# Altium PCB Prog_Adaptor.PcbDoc
Units mm, origin at the board's own origin, x right, y up, seen from the top; angles counter-clockwise.
Board outline 29.35 x 25.7 mm, 2 copper layers (Top Layer, Bottom Layer), stack 1.591 mm thick; 6 components, 10 nets, 48 pads, 1 vias.
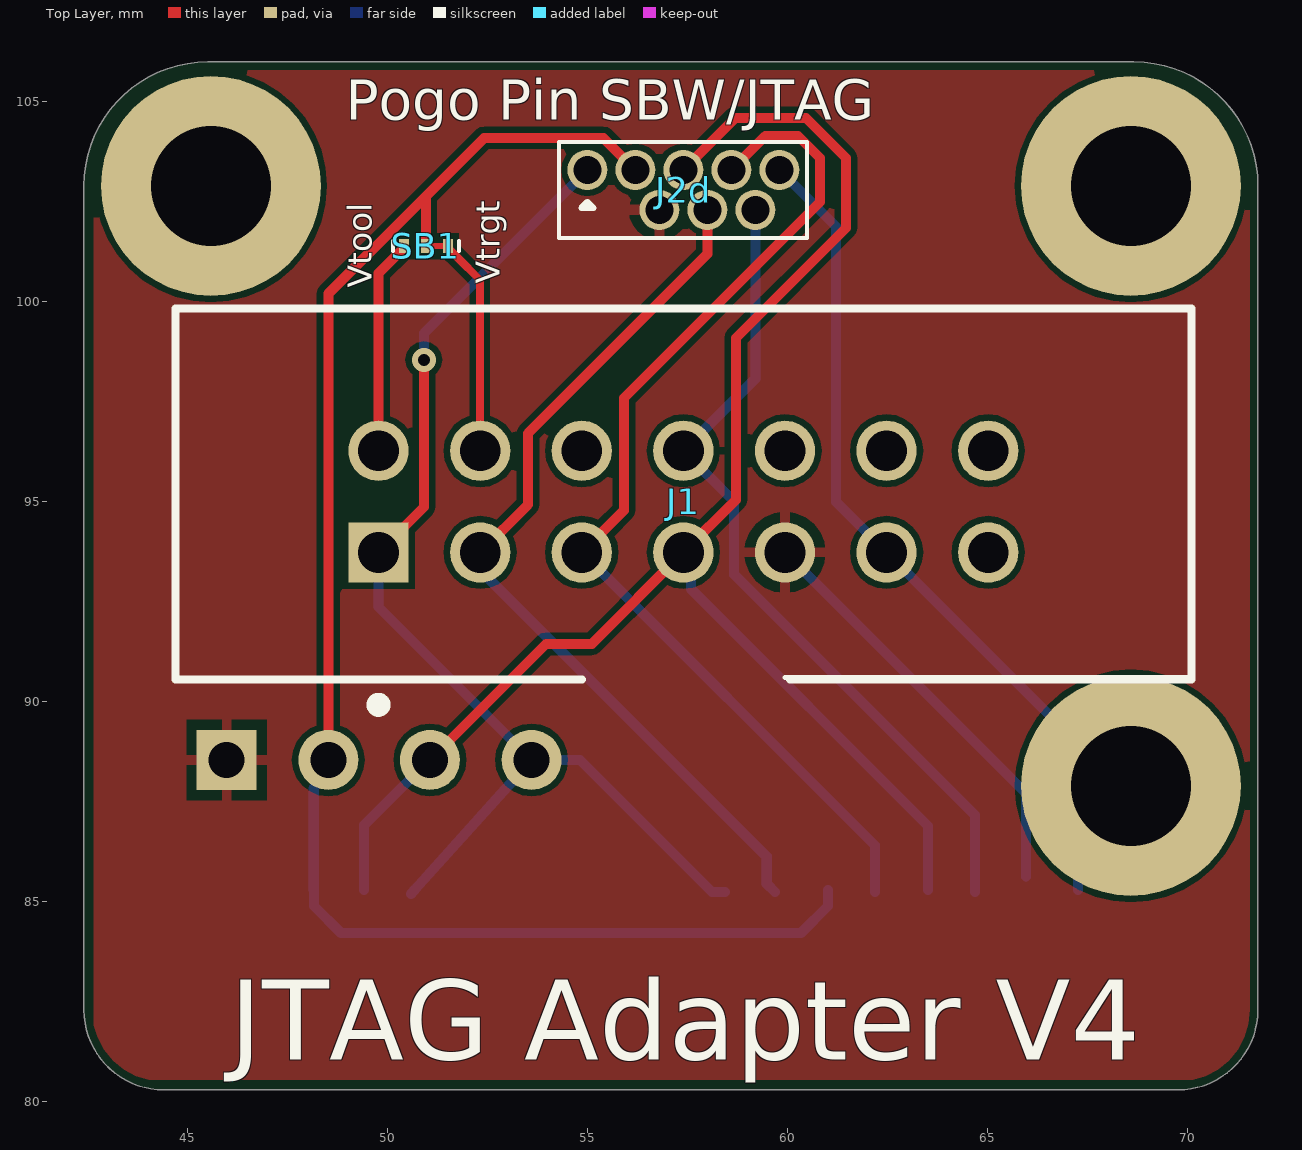
[diagram p0: Top Layer view]
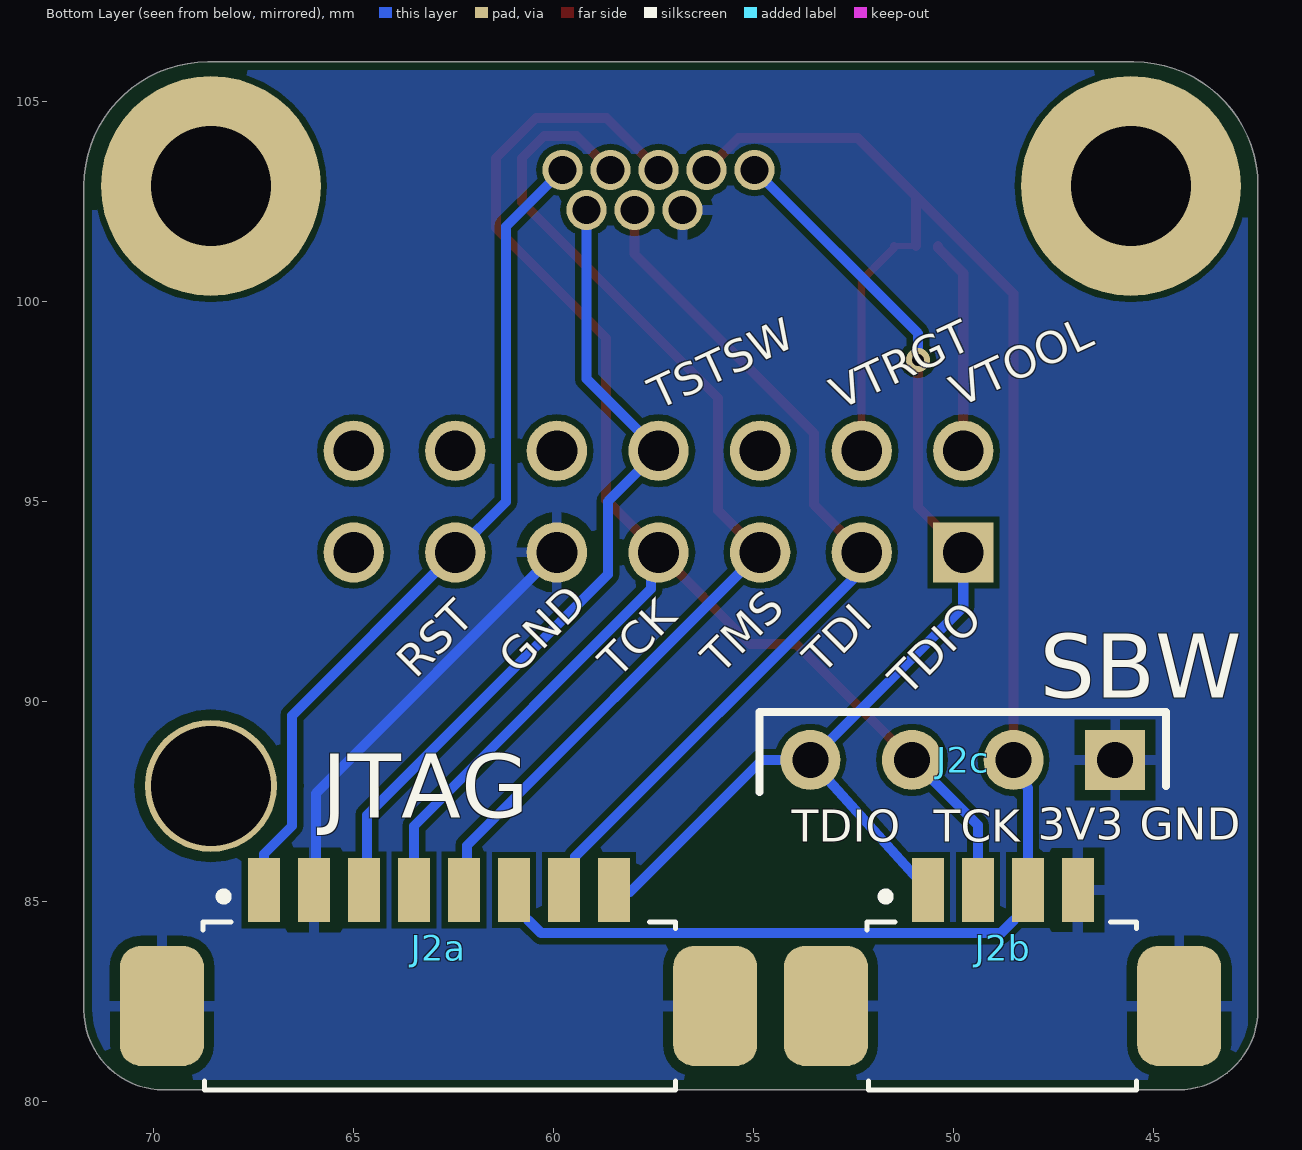
[diagram p1: Bottom Layer view, seen from below]

## Layer stack, top to bottom
Top Solder: solder mask 0.0102, Solder Resist, Dk 3.5
Top Layer: signal copper 0.0356
Dielectric 1: dielectric 1.52, FR-4, Dk 4.8
Bottom Layer: signal copper 0.0356
Bottom Solder: solder mask 0.0102, Solder Resist, Dk 3.5

## Board outline
44.4,80.3 cw(c44.4,82.3) 42.4,82.3 42.4,102.9 cw(c45.5,102.9) 45.5,106 68.65,106 cw(c68.65,102.9) 71.75,102.9 71.75,82.3 cw(c69.75,82.3) 69.75,80.3

## Design rules (kind name [scope] priority, off if disabled: settings)
BoardOutlineClearance [All] p1: gap=0.254 ignorepadtopadclearanceinfootprint=FALSE except(0: Arc-SplitContinuation Track-SplitContinuation SMDPad-SplitContinuation THPad-SplitContinuation Via-SplitContinuation Fill-SplitContinuation Poly-SplitContinuation Region-SplitContinuation Text-SplitContinuation)
Clearance [All] p1: gap=0.152 ignorepadtopadclearanceinfootprint=FALSE except(0: Arc-Hole Track-Hole SMDPad-Hole THPad-Hole Via-Hole Fill-Hole Poly-Hole Region-Hole Text-Hole; 0.127: THPad-THPad Via-Via)
HoleSize [All] p1: absolutevalues=TRUE maxlimit=6.2 minlimit=0.3 maxpercent=80.000 minpercent=20.000
MinimumAnnularRing [All] p1: minimumring=0.15
MinimumSolderMaskSliver [All] p1: minsoldermaskwidth=0.1
PolygonConnect ViaConnect [IsVia] p1: connectstyle=Direct reliefconductorwidth=0.254 reliefentries=4 polygonreliefangle="90 Angle" airgapwidth=0.254
PolygonConnect [All] p2: connectstyle=Relief reliefconductorwidth=0.254 reliefentries=4 polygonreliefangle="90 Angle" airgapwidth=0.254
RoutingVias [All] p1: holewidth=0.3 width=0.6 viastyle="Through Hole" minholewidth=0.3 minwidth=0.5 maxholewidth=1 maxwidth=5
SilkToSilkClearance [All] p1: silktosilkclearance=0.1
SilkToSolderMaskClearance [IsPad] p1: minsilkscreentomaskgap=0.1 clearancetoexposedcopper=TRUE
SolderMaskExpansion [All] p1: expansion=0.051 istentingtop=FALSE
Width [All] p1: maxlimit=25.4 minlimit=0.15 preferedwidth=0.3
26 further rules are at their usual default settings.

## Components (designator, comment, footprint, x,y, rotation, side; value= is the part's Value field where it differs from the comment)
J1 "SBH11-PBPC-D07-ST-BK" SBH11-PBPC-D07-ST-BK 57.386,95.008 r0 top
J2a "0532610871" MOLEX_0532610871 62.25,82.9 r180 bottom
J2b "0532610471" MOLEX_0532610471 50.65,85.3 r180 bottom
J2c "Header 4" HDR1X4 45.97,88.55 r0 bottom
J2d "*" POGO_8_PIN_HEADER 57.386,102.8 r0 top
SB1 "Solder Jumper 3-pin Left connected 0201" "Solder Bridge 3-pin Left shorted 0201" 50.95,101.4 r180 top net-tie

## Footprints (in the part's own frame and the unit in brackets; to place one, negate y for a bottom-side part, rotate by r counter-clockwise, add the part's x,y. Pads: shape width x height; smd on the part's side, far side on the other; paste and mask are expansions set on the pad)
HDR1X4 [mm] "Connector; Header; 4 Position"
  rect 1.5x1.5 hole 0.9: 1(0,0)
  round 1.5 hole 0.9: 2(2.54,0) 3(5.08,0) 4(7.62,0)
  silkscreen extent -1.27,-1.2 8.89,0.8
MOLEX_0532610471 [mm] "Header - Picoblade 04-pin, SMT, RA, 3.4mm height"
  rect 0.8x1.6 smd mask+0.051: 1(0,0) 2(1.25,0) 3(2.5,0) 4(3.75,0)
  rrect50% 2.1x3 smd mask+0.051: MP1(-2.55,-2.9) MP2(6.28,-2.9)
  silkscreen extent -1.52,-5 5.21,-0.07, body extent -3.2,-5 6.95,0.2, height 3.4
MOLEX_0532610871 [mm] "Header - Picoblade 08-pin, SMT, RA, 3.4mm height"
  rect 0.8x1.6 smd mask+0.051: 1(-5,2.4) 2(-3.75,2.4) 3(-2.5,2.4) 4(-1.25,2.4) 5(0,2.4) 6(1.25,2.4) 7(2.5,2.4) 8(3.75,2.4)
  rrect50% 2.1x3 smd mask+0.051: MP1(-7.55,-0.5) MP2(6.28,-0.5)
  silkscreen extent -6.52,-2.6 5.29,2.33, body extent -8.2,-2.6 6.95,2.6, height 3.42
POGO_8_PIN_HEADER [mm]
  round 1 hole 0.7 mask+0.033: 1(-2.4,0.5) 2(-1.2,0.5) 3(-0.6,-0.5) 4(0,0.5) 5(0.6,-0.5) 6(1.2,0.5) 7(1.8,-0.5) 8(2.4,0.5)
  silkscreen extent -3.11,-1.2 3.09,1.2
SBH11-PBPC-D07-ST-BK [mm]
  rect 1.508x1.508 hole 1.02: 01(-7.62,-1.27)
  round 1.508 hole 1.02: 02(-7.62,1.27) 03(-5.08,-1.27) 04(-5.08,1.27) 05(-2.54,-1.27) 06(-2.54,1.27) 07(0,-1.27) 08(0,1.27) 09(2.54,-1.27) 10(2.54,1.27) 11(5.08,-1.27) 12(5.08,1.27) 13(7.62,-1.27) 14(7.62,1.27)
  silkscreen extent -12.7,-5.18 12.7,4.82, body extent -12.7,-4.44 12.7,4.83, height 8.89
"Solder Bridge 3-pin Left shorted 0201" [mm]
  rect 0.25x0.35 smd paste-100 mask+0: 1(0,0) 2(-0.55,0) 3(0.55,0)
  Top Layer lines w0.15: -0.05,0 -0.475,0
  silkscreen extent -0.82,-0.13 0.83,0.13

## Part data
J1: "14-pin JTAG Male Header"
J2a: "Header - Picoblade 08-pin, SMT, RA", Supplier 1 Part No.=WM7626CT-ND, MF Part No.=0532610871, Mounting Type="Surface Mount", Orientation="Right Angle", Pins=8, Pitch=1.25mm, Supplier 1=Digikey
J2b: "Header - Picoblade 04-pin, SMT, RA", Supplier 1 Part No.=WM7622CT-ND, MF Part No.=0532610471, Mounting Type="Surface Mount", Orientation="Right Angle", Pins=4, Pitch=1.25mm, Supplier 1=Digikey
J2c: "Header, 4-Pin", LatestRevisionDate=17-Jul-2002, LatestRevisionNote="Re-released for DXP Platform.", Publisher="Altium Limited"
J2d: library part "Headerless Pogo Holes 8-pin"
SB1: library part "Solder Jumper 3-pin Normally Closed 0201", DEBUG=DEBUG

## Free pads (board coordinates)
  round 5.5 hole 3: MH1(45.575,102.9) MH2(68.575,102.9)
  round 5.5 / inner round 5.5 / far side round 3.3 hole 3: MH2(68.575,87.9)

## Via types
v1: diameter 0.6, hole 0.3, Top Layer to Bottom Layer, tented both sides, 1 vias

## Nets (pads, with @x,y where several pads share a name; then routed paths per layer and width w, separated by ;. In a path a pad name is that pad's centre, name@x,y a point inside that pad or via, vN(x,y) a via of type N, cw(c..) or ccw(c..) an arc to the next point about the centre after c; other vN are vias at no path point)
3v3: J2a.6 J2b.3 J2c.2 J2d.2 SB1.1 | length 40.1
  Top Layer w0.254: J2c.2 48.51,100.205 50.505,102.2 50.95,102.645 ; SB1.1 50.95,102.645 ; J2d.2 55.386,104.1 52.405,104.1 50.95,102.645
  Bottom Layer w0.254: J2b.3@48.146,85.304 48.146,87.849 48.51,88.213 J2c.2 ; J2b.3 48.15,84.9 48.829,84.221 60.321,84.221 61,84.9 J2a.6
GND: J1.09 J2a.2 J2a.MP1 J2a.MP2 J2b.4 J2b.MP1 J2b.MP2 J2c.1 J2d.3 | length 10.6
  Bottom Layer w0.254: J1.09 65.95,87.714 J2a.2@65.95,85.635
JTAG_TCK/SBW_TCK: J1.07 J2a.4 J2b.2 J2c.3 J2d.4 | length 40
  Top Layer w0.254: J2c.3@50.95,88.55 J2c.3 53.95,91.45 55.098,91.45 J1.07 58.7,95.052 58.7,99.1 61.45,101.85 61.45,103.6 60.45,104.6 58.686,104.6 J2d.4
  Bottom Layer w0.254: J2b.2 49.4,86.92 J2c.3@51.03,88.55 ; J1.07 57.573,93.551 57.573,92.827 63.5,86.9 J2a.4
JTAG_TDI: J1.03 J2a.7 J2d.5 | length 22.6
  Top Layer w0.254: J1.03 53.5,94.932 53.5,96.714 57.986,101.2 J2d.5@57.986,102.4
  Bottom Layer w0.254: J1.03 52.306,93.294 59.472,86.128 59.472,85.453 J2a.7@59.675,85.25
JTAG_TDO/SBW_TDIO: J1.01 J2a.8 J2b.1 J2c.4 J2d.1 | length 29.2
  Top Layer w0.254: J1.01 50.9,94.872 v1(50.9,98.55)
  Bottom Layer w0.254: J1.01 49.766,92.374 J2c.4 ; J2b.1@50.575,85.2 50.658,85.293 J2c.4 ; v1(50.9,98.55) 50.9,99.214 J2d.1 ; J2a.8@58.425,85.25 58.1,85.25 54.8,88.55 J2c.4
JTAG_TEST/SBW_TCK: J1.08 J2a.3 J2d.7 | length 20.9
  Bottom Layer w0.254: J2d.7@59.186,102.4 59.186,98.078 J1.08 58.65,95.014 58.65,93.192 64.675,87.167 J2a.3@64.675,85.25
JTAG_TMS: J1.05 J2a.5 J2d.6 | length 26.6
  Top Layer w0.254: J1.05 55.9,94.792 55.9,97.6 60.8,102.5 60.8,103.6 60.25,104.15 59.436,104.15 J2d.6
  Bottom Layer w0.254: J1.05 62.175,86.409 J2a.5@62.175,85.25
Reset: J1.11 J2a.1 J2d.8 | length 21.2
  Bottom Layer w0.254: J2d.8 60.05,103.3 60.05,103.036 61.2,101.886 61.2,95.004 J1.11 66.55,89.654 66.55,88.042 66.548,87.994 ccw(c68.575,87.9) 66.548,87.806 66.55,87.758 66.55,86.9 67.25,86.2 J2a.1
VccTarget: J1.04 SB1.2 | length 5.5
  Top Layer w0.2: SB1.2 51.5,101.35 51.725,101.125 52.306,100.544 J1.04
VccTool: J1.02 SB1.3 | length 5.4
  Top Layer w0.254: J1.02 49.766,100.72 50.4,101.354 SB1.3
pads on no net: J1.06 J1.10 J1.12 J1.13 J1.14

## Polygon pours and split planes (outlines as drawn)
GND on Top Layer "GND" (solid, remove dead copper, pour order 0): 42.65,106 42.65,80.55 71.75,80.55 71.75,106
GND on Bottom Layer "GND" (solid, remove dead copper, pour order 4): 42.65,106 42.65,80.55 71.75,80.55 71.75,106

## Silkscreen, mask and mechanical layers (free items; w line width, h text height)
Top Overlay:
  lines w0.127: 44.75,90.6 54.85,90.6 ; 59.926,90.608 70.026,90.608
  text "Pogo Pin SBW/JTAG" at 48.95,104.55 h1
  text "Vtrgt" at 52.8,100.45 h0.6 r90
  text "Vtool" at 49.6,100.35 h0.6 r90
  text "JTAG Adapter V4" at 46.05,81.05 h2
Bottom Overlay:
  text "VTOOL" at 49.85,97.35 h0.8 r335
  text "VTRGT" at 52.856,97.295 h0.8 r335
  text "TSTSW" at 57.386,97.295 h0.8 r335
  text "TDI" at 53.29,90.65 h0.8 r315
  text "TMS" at 55.83,90.65 h0.8 r315
  text "GND" at 60.91,90.65 h0.8 r315
  text "TCK" at 58.4,90.55 h0.8 r315
  text "RST" at 63.45,90.55 h0.8 r315
  text "SBW" at 47.85,90.1 h1.6
  text "TDIO" at 51.15,90.1 h0.8 r315
  text "JTAG" at 65.8,87.1 h1.6
  text "GND" at 45.35,86.55 h0.8
  text "3V3" at 47.9,86.55 h0.8
  text "TCK" at 50.5,86.5 h0.8
  text "TDIO" at 54.05,86.5 h0.8
Board Outline:
  lines w0.1: 45.5,106 ccw(c45.5,102.9) 42.4,102.9 42.4,82.3 ccw(c44.4,82.3) 44.4,80.3 69.75,80.3 ; 45.5,106 68.65,106 ; 45.5,106 45.5,106 ; 68.65,106 cw(c68.65,102.9) 71.75,102.9 ; 68.65,106 68.65,106 ; 69.75,80.3 ccw(c69.75,82.3) 71.75,82.3 71.75,102.9 ; 69.75,80.3 69.75,80.3 ; 71.75,102.9 71.75,102.9